# Altium PCB PCB1.PcbDoc
Units mil, origin at the board's own origin, x right, y up, seen from the top; angles counter-clockwise.
Board outline 3543.31 x 3937.01 mil, 2 copper layers (Top Layer, Bottom Layer); 9 components, 25 nets, 87 pads, 9 vias.
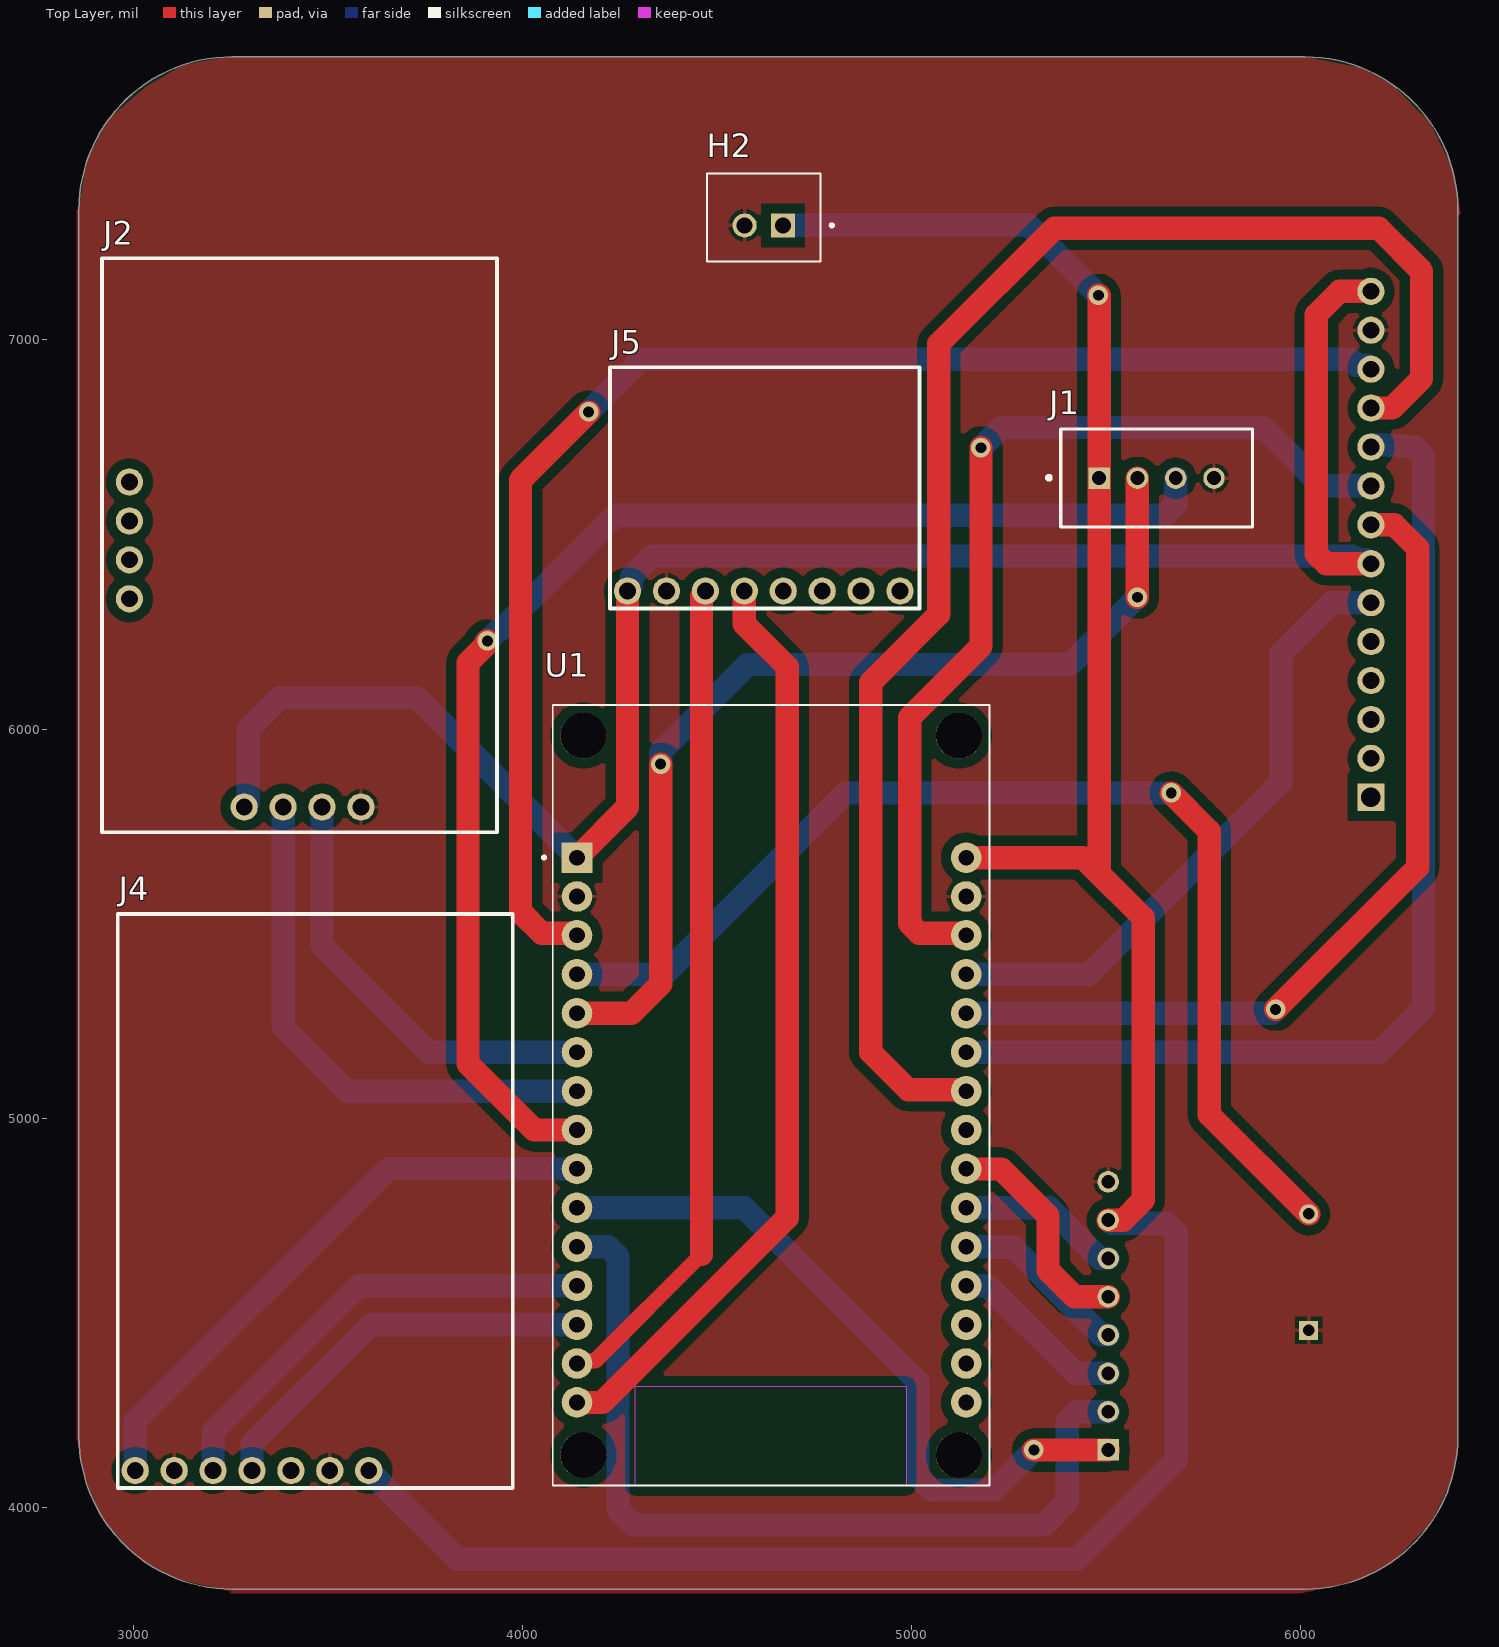
[diagram p0: Top Layer view]
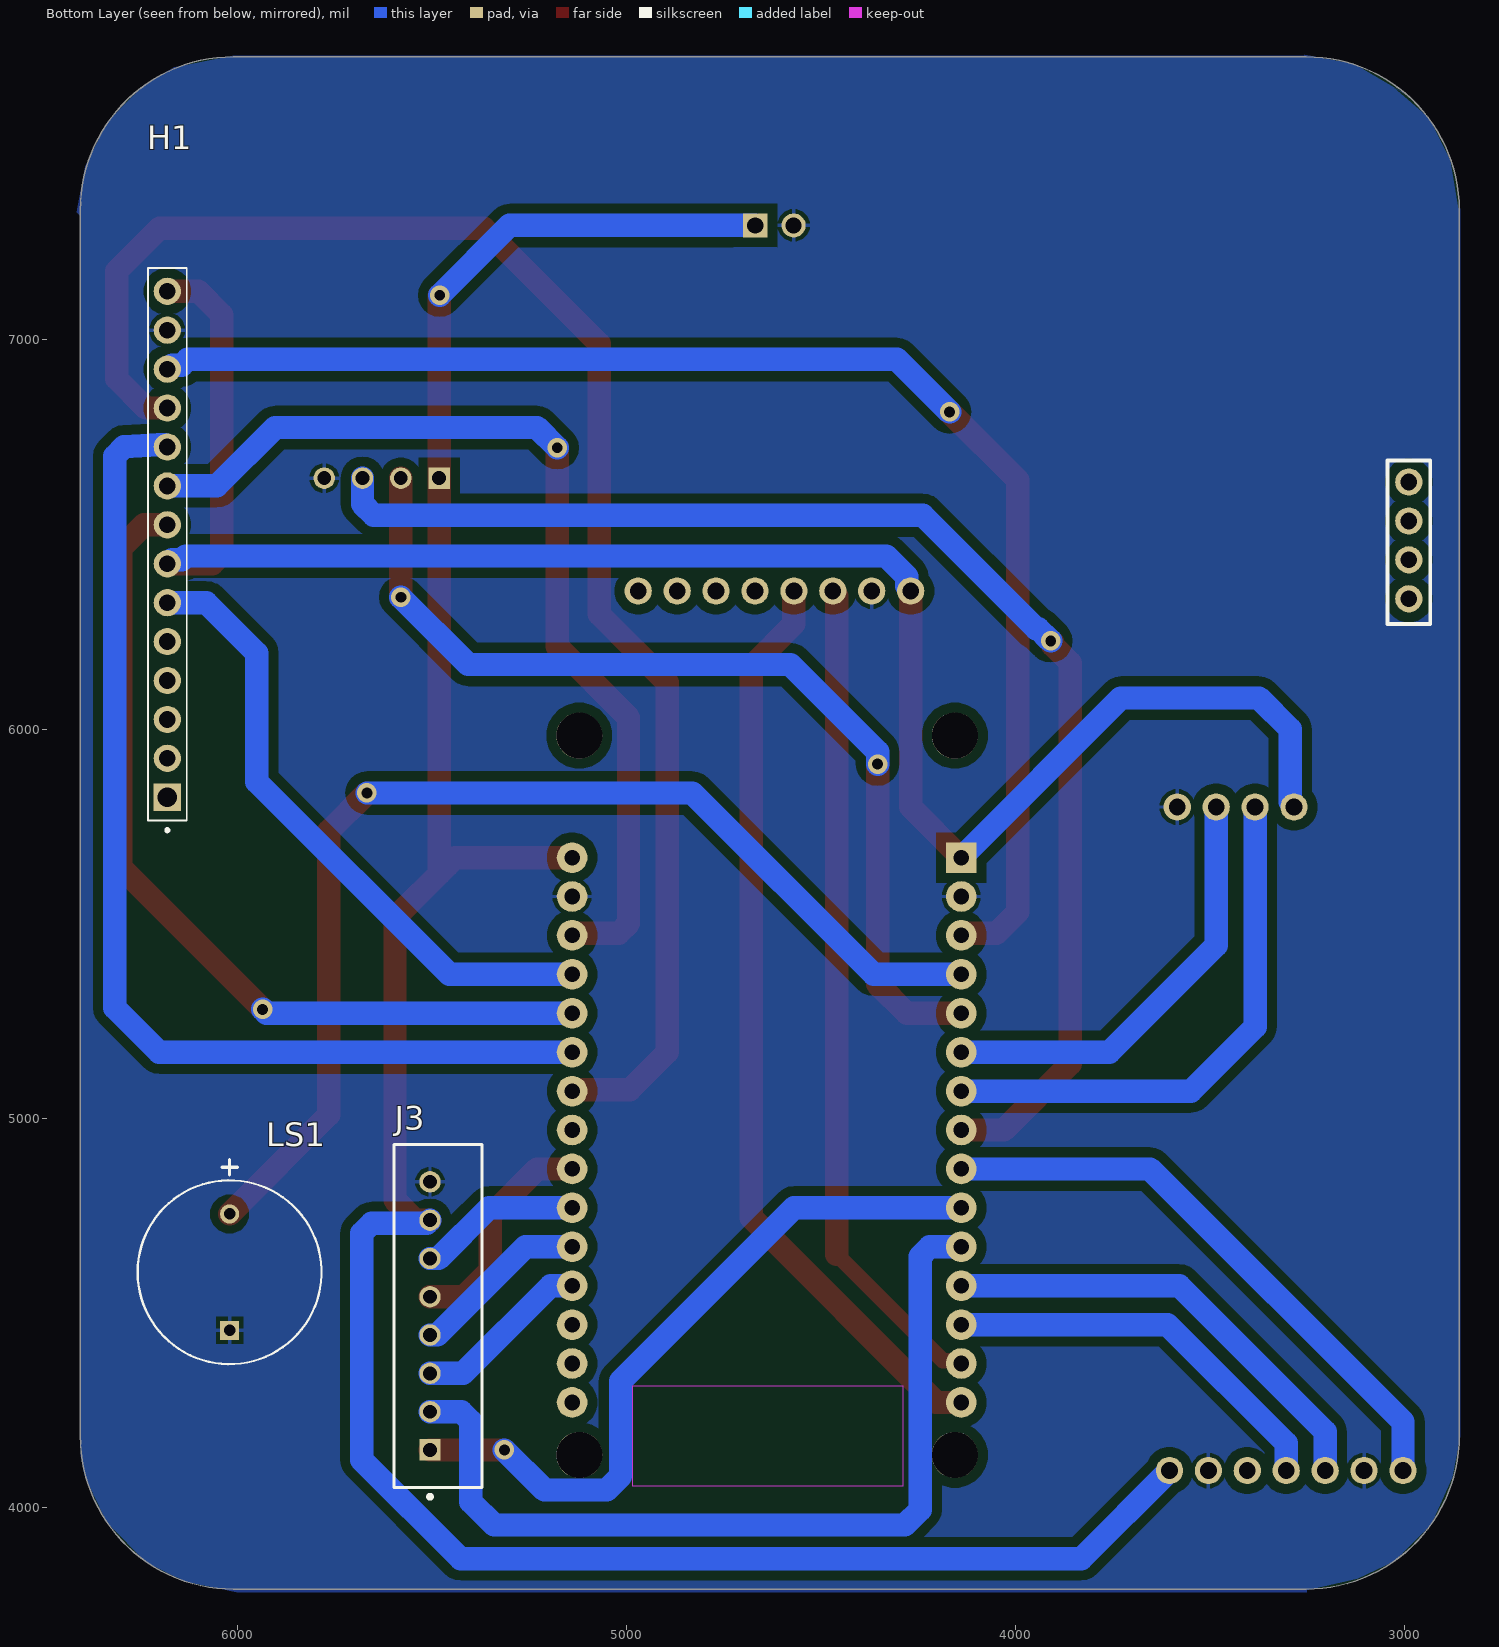
[diagram p1: Bottom Layer view, seen from below]

## Layer stack, top to bottom
Top Solder: solder mask 0.4, Solder Resist, Dk 3.5
Top Layer: signal copper 1.4
Dielectric 1: dielectric 12.6, FR-4, Dk 4.8
Bottom Layer: signal copper 1.4
Bottom Solder: solder mask 0.4, Solder Resist, Dk 3.5

## Board outline
3254.04,3790.42 cw(c3254.04,4184.12) 2860.34,4184.12 2860.34,7333.73 cw(c3254.04,7333.73) 3254.04,7727.43 6009.94,7727.43 cw(c6009.94,7333.73) 6403.64,7333.73 6403.64,4184.12 cw(c6009.94,4184.12) 6009.94,3790.42

## Design rules (kind name [scope] priority, off if disabled: settings)
Clearance Clearance_3 [All] p1: gap=25 ignorepadtopadclearanceinfootprint=FALSE
Clearance [All] p2: gap=10 ignorepadtopadclearanceinfootprint=FALSE ismatrix=TRUE
PolygonConnect [All] p1: connectstyle=Relief reliefconductorwidth=10 reliefentries=4 polygonreliefangle="90 Angle" airgapwidth=10
RoutingVias [All] p1: holewidth=28 width=50 viastyle="Through Hole" minholewidth=28 minwidth=50 maxholewidth=28 maxwidth=50
SolderMaskExpansion [All] p1: expansion=4 istentingtop=FALSE
Width MaxMinWidth_1 [All] p1: maxlimit=70 minlimit=20 preferedwidth=60 minimp=50.000000 maximp=50.000000 favimp=50.000000
Width [All] p2: maxlimit=10 minlimit=10 preferedwidth=10
30 further rules are at their usual default settings.

## Components (designator, comment, footprint, x,y, rotation, side; value= is the part's Value field where it differs from the comment)
H1 "Display Headers" SULLINS_PPTC061LFBN-RC 6190,6575 r90 bottom
H2 "B2B-XH-A(LF)(SN)" JST_B2B-XH-A(LF)(SN) 4620,7315 r0 top
J1 "B04B-XASK-1(LF)(SN)" FP-B04B-XASK-1_LF_SN-MFG 5629.21,6645 r180 top
J2 "GPS" GPS 3455,6605 r0 top
J3 "B8B-XH-A(LF)(SN)" FP-B8B-XH-A_LF_SN-MFG 5484.33,4492.36 r270 bottom
J4 "SIM800L" SIM800L 3495,4920 r0 top
J5 "MPU6050" MPU6050 4760,7180 r0 top
LS1 "MCKPX-G1203A-K4056" "FP-MCKPX-G1203A-K4056-MFG - duplicate" 6020,4604.61 r90 bottom
U1 "ESP32-DEVKIT-V1" MODULE_ESP32_DEVKIT_V1 4640,5059.17 r0 top

## Footprints (in the part's own frame and the unit in brackets; to place one, negate y for a bottom-side part, rotate by r counter-clockwise, add the part's x,y. Pads: shape width x height; smd on the part's side, far side on the other; paste and mask are expansions set on the pad)
FP-B04B-XASK-1_LF_SN-MFG [mm]
  rect 1.4x1.4 hole 0.9 paste-2539.97 mask+0: 1(3.75,0)
  round 1.4 hole 0.9 paste-2539.97 mask+0: 2(1.25,0) 3(-1.25,0) 4(-3.75,0)
  silkscreen extent -6.25,-3.2 7.15,3.2, body extent -6.35,-3.3 6.35,3.3, height 0.25
FP-B8B-XH-A_LF_SN-MFG [mm]
  rect 1.4x1.4 hole 0.9 paste-2539.97 mask+0: 1(8.75,-0.525)
  round 1.4 hole 0.9 paste-2539.97 mask+0: 2(6.25,-0.525) 3(3.75,-0.525) 4(1.25,-0.525) 5(-1.25,-0.525) 6(-3.75,-0.525) 7(-6.25,-0.525) 8(-8.75,-0.525)
  silkscreen extent -11.2,-2.88 11.92,2.87, body extent -11.2,-2.88 11.2,2.88, height 7
"FP-MCKPX-G1203A-K4056-MFG - duplicate" [mm]
  round 1.25 hole 0.75 paste-2539.97 mask+0: +(3.8,0)
  rect 1.25x1.25 hole 0.75 paste-2539.97 mask+0: -(-3.8,0)
  silkscreen extent -6,-6 7.35,6, body extent -6,-6 6.38,6, height 9.5
GPS [mil]
  round 70 hole 43: 1(-170,-805) 2(-70,-805) 3(30,-805) 4(130,-805)
  silkscreen extent -535,-870 480,605
JST_B2B-XH-A(LF)(SN) [mm]
  rect 1.575x1.575 / inner round 1.575 / far side rect 1.575x1.575 hole 1.05: 1(1.25,-0.525)
  round 1.575 hole 1.05: 2(-1.25,-0.525)
  silkscreen extent -3.7,-2.88 4.54,2.87, body extent -3.7,-2.88 3.7,2.88, height 7
MODULE_ESP32_DEVKIT_V1 [mm]
  rect 2x2 / inner round 2 / far side rect 2x2 hole 1.02: 1(-12.7,15.515)
  round 2 hole 1.02: 2(-12.7,12.975) 3(-12.7,10.435) 4(-12.7,7.895) 5(-12.7,5.355) 6(-12.7,2.815) 7(-12.7,0.275) 8(-12.7,-2.265) 9(-12.7,-4.805) 10(-12.7,-7.345) 11(-12.7,-9.885) 12(-12.7,-12.425) 13(-12.7,-14.965) 14(-12.7,-17.505) 15(-12.7,-20.045) 16(12.7,-20.045) 17(12.7,-17.505) 18(12.7,-14.965) 19(12.7,-12.425) 20(12.7,-9.885) 21(12.7,-7.345) 22(12.7,-4.805) 23(12.7,-2.265) 24(12.7,0.275) 25(12.7,2.815) 26(12.7,5.355) 27(12.7,7.895) 28(12.7,10.435) 29(12.7,12.975) 30(12.7,15.515)
  round 3 hole 3 unplated: ""(-12.28,-23.475) ""(-12.28,23.475) ""(12.23,-23.475) ""(12.23,23.475)
  Keep-Out Layer region: 8.78,-25.475 -8.91,-25.475 -8.91,-18.985 8.78,-18.985
  Keep-Out Layer region: 8.78,-25.475 -8.91,-25.475 -8.91,-18.985 8.78,-18.985
  silkscreen extent -14.95,-25.48 14.23,25.48, body extent -14.1,-25.9 14.1,26.55, height 7.05
MPU6050 [mil]
  round 70 hole 43: 1(-490,-825) 2(-390,-825) 3(-290,-825) 4(-190,-825) 5(-90,-825) 6(10,-825) 7(110,-825) 8(210,-825)
  silkscreen extent -535,-870 260,-250
SIM800L [mil]
  round 70 hole 43: 1(-490,-825) 2(-390,-825) 3(-290,-825) 4(-190,-825) 5(-90,-825) 6(10,-825) 7(110,-825)
  silkscreen extent -535,-870 480,605
SULLINS_PPTC061LFBN-RC [mil]
  rect 70x70 hole 50: 1(-750,-10)
  round 70 hole 43: 2(-650,-10) 3(-550,-10) 4(-450,-10) 5(-350,-10) 6(-250,-10) 7(-150,-10) 8(-50,-10) 9(50,-10) 10(150,-10) 11(250,-10) 12(350,-10) 13(450,-10) 14(550,-10) ""(-240,-3200) ""(-140,-3200) ""(-40,-3200) ""(60,-3200)
  silkscreen extent -839,-3255 610,40, body extent -1084,-3180 885,41, height 650

## Part data
H1: library part "TFT-LCD-2.8'' Display Headers"
H2: "Connector Header Through Hole 2 position 0.098 (2.50mm)", Package=None, Check_prices=https://www.snapeda.com/parts/B2B-XH-A(LF)(SN)/JST+Sales+America+Inc./view-part/?ref=eda, MF="JST Sales America Inc.", MP=B2B-XH-A(LF)(SN), SnapEDA_Link=https://www.snapeda.com/parts/B2B-XH-A(LF)(SN)/JST+Sales+America+Inc./view-part/?ref=snap
J1: library part CMP-17439-000018-1, "CONN HEADER VERT 4POS 2.5MM", Current Rating=3A, Manufacturer=JST, Temperature="-25°C to +85°C", Temperature Range High=+85°C, Temperature Range Low=-25°C, Voltage Rating=250V, Automotive=No, Category=Conn, ComponentLink2Description=Datasheet, ComponentLink2URL=http://www.jst-mfg.com/product/pdf/eng/eXA1.pdf, Conn Gender=Male, Conn Orientation=Straight, Contact Material=Tin,Copper, Device Class L1=Connectors, Device Class L2="Headers and Wire Housings", Device Class L3=unset, Digikey Description="CONN HEADER VERT 4POS 2.5MM", Height=8.8mm, Lead Free=Yes, Manufacturer Part Number=B04B-XASK-1(LF)(SN), Number Of Contacts=4, Number Of Rows=1, Octopart=https://octopart.com/b04b-xask-1%28lf%29%28sn%29-jst-3990149, Package=B04B-XASK-1(LF)(SN), Pitch=2.5mm, RoHS=TRUE
J2: Current Rating=3A, Manufacturer=JST, Manufacturer Part Number=B04B-XASK-1(LF)(SN), Temperature="-25°C to +85°C", Temperature Range High=+85°C, Temperature Range Low=-25°C, Voltage Rating=250V, Automotive=No, Category=Conn, ComponentLink2Description=Datasheet, ComponentLink2URL=http://www.jst-mfg.com/product/pdf/eng/eXA1.pdf, Conn Gender=Male, Conn Orientation=Straight, Contact Material=Tin,Copper, Device Class L1=Connectors, Device Class L2="Headers and Wire Housings", Device Class L3=unset, Digikey Description="CONN HEADER VERT 4POS 2.5MM", Height=8.8mm, Lead Free=Yes, Number Of Contacts=4, Number Of Rows=1, Octopart=https://octopart.com/b04b-xask-1%28lf%29%28sn%29-jst-3990149, Package=B04B-XASK-1(LF)(SN), Pitch=2.5mm, RoHS=TRUE
J3: library part CMP-17438-000015-1, "CONN HEADER VERT 8POS 2.5MM", Color=Natural, Contact Resistance=20mR, Current Rating=3A, Housing Color=White, Insulation Resistance=1GR, Max Operating Temperature=85°C, Max Voltage Rating (AC)=250V, Min Operating Temperature=-25°C, Connector Type="Male Pin", Contact Material=Brass, Contact Plating=Tin, Contact Type="Male Pin", Depth=5.75mm, Fastening Type=Detent, Housing Material=Polyamide, Lead Free="Lead Free", Lead Pitch=2.5mm, Length=22.4mm, Max Current Rating=3A, Mount="Through Hole", Number Of Contacts=8, Number of Positions=8, Number Of Rows=1, Orientation=Straight, Packaging=Bulk, Pitch=2.5mm, REACH SVHC="No SVHC", Series=XH, Termination=Press-Fit, Voltage Rating=250V, Voltage Rating (AC)=250V, Wire/Cable Gauge=22AWG
LS1: "MAGNETIC BUZZER AND TRANSDUCER - More Details", Current=30mA, Frequency=2300Hz, Manufacturer="Multicomp Pro", Max Supply Voltage=5V, Min Supply Voltage=2V, Operating Supply Voltage=3V, Package=0, Temperature="-20°C to +70°C", Temperature Range High=+70°C, Temperature Range Low=-20°C, Automotive=No, Category=Speak, ComponentLink2Description=Datasheet, ComponentLink2URL=http://www.farnell.com/datasheets/1498149.pdf?_ga=2.17855225.1157923166.1572356775-536200964.1569240579, Device Class L1=Electromechanical, Device Class L2="Audio Products", Device Class L3=Buzzers, Height=9.5mm, Lead Free=Yes, Manufacturer Part Number=MCKPX-G1203A-K4056, Octopart=https://octopart.com/mckpx-g1203a-k4056-multicomp-12157154, RoHS=TRUE, Standoff Height=0.5mm
U1: "Dual core, Wi-Fi: 2.4 GHz up to 150 Mbits/s,BLE (Bluetooth Low Energy) and legacy Bluetooth, 32 bits, Up to 240 MHz", Package=None, Check_prices=https://www.snapeda.com/parts/ESP32-DEVKIT-V1/Do+it/view-part/?ref=eda, MF="Do it", MP=ESP32-DEVKIT-V1, SnapEDA_Link=https://www.snapeda.com/parts/ESP32-DEVKIT-V1/Do+it/view-part/?ref=snap

## Via types
v1: diameter 50, hole 28, Top Layer to Bottom Layer, 9 vias

## Nets (pads, with @x,y where several pads share a name; then routed paths per layer and width w, separated by ;. In a path a pad name is that pad's centre, name@x,y a point inside that pad or via, vN(x,y) a via of type N, cw(c..) or ccw(c..) an arc to the next point about the centre after c; other vN are vias at no path point)
3V3: H1.7 H1.14 J2.1 J5.1 U1.1 | length 4892.8
  Top Layer w60: U1.1 4270,5800 J5.1 ; H1.7 6064.9,6425 6040,6449.9 6040,7065 6100,7125 H1.14
  Bottom Layer w60: J2.1 3285,5802.71 3295,5812.71 3295,6000 3375,6080 3730,6080 U1.1 ; J5.1 4270,6357.71 4280,6367.71 4280,6392.28 4332.72,6445 6132.72,6445 6142.72,6435 6167.29,6435 6177.29,6425 H1.7
GND: H1.13 H2.2 J1.4 J2.4 J3.8 J4.2 J4.6 J5.2 LS1.- U1.2 U1.29
NetH1_6: H1.6 U1.27 | length 1628.9
  Bottom Layer w60: U1.27 5455,5370 5950,5865 5950,6195 6080,6325 H1.6
NetH1_8: H1.8 U1.26 | length 2280.2
  Top Layer w60: v1(5935,5280) 6300,5645 6300,6465 6240,6525 H1.8
  Bottom Layer w60: U1.26 5925,5270 v1(5935,5280)
NetH1_9: H1.9 U1.28 | length 2541.6
  Top Layer w60: U1.28 5136.41,5473.59 5123.16,5473.59 5121.12,5475.63 5019.9,5475.63 4995,5500.53 4995,6030 5178,6213 v1(5178,6723)
  Bottom Layer w60: v1(5178,6723) 5230,6775 5903,6775 6053,6625 H1.9
NetH1_10: H1.10 U1.25 | length 2787
  Bottom Layer w60: U1.25 6200.91,5170 6315,5284.09 6315,6701.64 6291.12,6725.52 6202.51,6730.7 6186.41,6730.7 H1.10
NetH1_11: H1.11 U1.24 | length 4025.6
  Top Layer w60: U1.24 5136.41,5073.59 4991.41,5073.59 4895,5170 4895,6120 5070,6295 5070,6990 5367,7287 6200,7287 6310,7177 6310,6900 6235,6825 H1.11
NetH1_12: H1.12 U1.3 | length 3603.6
  Top Layer w60: U1.3 4136.41,5473.59 4123.16,5473.59 4121.12,5475.63 4049.37,5475.63 3995,5530 3995,6640 v1(4170,6815)
  Bottom Layer w60: v1(4170,6815) 4305,6950 6127.72,6950 6142.72,6935 6167.29,6935 6177.29,6925 H1.12
NetJ1_2: J1.2 U1.5 | length 2538.5
  Top Layer w60: U1.5 4280,5270 4355,5345 v1(4355,5910) ; v1(5580,6339) J1.2
  Bottom Layer w60: v1(4355,5910) 4355,5942 4579,6166 5407,6166 v1(5580,6339)
NetJ1_3: J1.3 U1.8 | length 3438.7
  Top Layer w60: v1(3910,6226.95) 3905,6221.95 3905,6216 3860,6171 3860,5140 4030,4970 U1.8
  Bottom Layer w60: v1(3910,6226.95) 3913.52,6230.46 3914.46,6230.46 3942,6258 3947,6258 4239,6550 5650,6550 5678.43,6578.43 J1.3
NetJ2_2: J2.2 U1.7 | length 1388.3
  Bottom Layer w60: J2.2 3385,5235 3550,5070 U1.7
NetJ2_3: J2.3 U1.6 | length 1123.9
  Bottom Layer w60: J2.3 3485,5445 3760,5170 U1.6
NetJ3_1: J3.1 U1.10 | length 1850.9
  Top Layer w60: v1(5313.87,4147.87) J3.1
  Bottom Layer w60: U1.10 4569.83,4770 5015.67,4324.16 5015.67,4080.15 5050.82,4045 5211,4045 v1(5313.87,4147.87)
NetJ3_2: J3.2 U1.11 | length 2285.8
  Bottom Layer w60: U1.11@4140,4668.1 U1.11 4220.69,4670 4245.59,4645.1 4245.59,3994.41 4285,3955 5340,3955 5400,4015 5400,4221.4 5424.9,4246.3 J3.2
NetJ3_3: J3.3 U1.19 | length 458.3
  Bottom Layer w60: U1.19 5195,4570 5420.28,4344.72 J3.3
NetJ3_4: J3.4 U1.20 | length 459
  Bottom Layer w60: U1.20 5259.82,4670 5422.44,4507.38 5486.67,4443.15 J3.4
NetJ3_5: J3.5 U1.22 | length 583
  Top Layer w60: U1.22 5230,4870 5350.4,4749.6 5350.4,4609.6 5418.43,4541.57 J3.5
NetJ3_6: J3.6 U1.21 | length 418.8
  Bottom Layer w60: U1.21 5353.22,4770 5483.22,4640 J3.6
NetJ4_1: J4.1 U1.9 | length 1529.2
  Bottom Layer w60: J4.1 3005,4220 3655,4870 U1.9
NetJ4_3: J4.3 U1.12 | length 1190.3
  Bottom Layer w60: J4.3 3205,4195 3580,4570 U1.12
NetJ4_4: J4.4 U1.13 | length 1031.3
  Bottom Layer w60: J4.4 3305,4165 3610,4470 U1.13
NetJ5_3: J5.3 U1.14 | length 2145.1
  Top Layer w40: U1.14 4147.16,4377.16 4187.16,4377.16 4460,4650
  Top Layer w60: 4460,4650 4460,6342.29 4470,6352.29 J5.3
NetJ5_4: J5.4 U1.15 | length 2392.3
  Top Layer w60: U1.15 4205,4270 4680,4745 4680,6160 4570,6270 J5.4
NetLS1_+: LS1.+ U1.4 | length 2948
  Top Layer w60: v1(5667,5836) 5765,5738 5765,5009.21 LS1.+
  Bottom Layer w60: U1.4 4365,5370 4831,5836 v1(5667,5836)
VCC: H2.1 J1.1 J3.7 J4.7 U1.30 | length 6774
  Top Layer w60: U1.30 5440,5670 5460.79,5649.21 5595,5515 5595,4790 5543.42,4738.42 J3.7 ; v1(5480,7115) 5481.57,7113.43 J1.1 5481.57,5628.43
  Bottom Layer w60: J4.7 3832,3868 5426,3868 5680,4122 5680,4705.1 5655.1,4730 5513.42,4730 J3.7 ; H2.1 5300.67,7294.33 v1(5480,7115)
pads on no net: H1. H1.1 H1.2 H1.3 H1.4 H1.5 J4.5 J5.5 J5.6 J5.7 J5.8 U1. U1.16 U1.17 U1.18 U1.23

## Polygon pours and split planes (outlines as drawn)
GND on Bottom Layer "Top" (solid, remove dead copper, pour order 1): 3122.09,3816.64 3027.43,3862.57 2932.43,3957.57 2878.17,4077.65 2857.43,4182.57 2857.43,7337.57 2862.43,7337.57 2883.05,7461.05 2937.56,7569.06 3030.23,7649.92 2992.05,7627.99 3131.71,7709.71 3257.43,7732.57 3260,7730 6012.37,7730 6162.23,7700.58 6242.43,7652.57 6332.43,7562.57 6390.85,7444.73 6412.43,7327.57 6402.43,7317.57 6402.43,4183.05 6402.43,4133.25 6390.85,4077.65 6334.68,3960.6 6232.81,3858.73 6132.22,3809.42 6001.95,3782.57 3252.43,3782.57 3252.43,3787.57
GND on Top Layer "Top" (solid, remove dead copper, pour order 0): 3119.66,3814.06 3025,3860 2930,3955 2875.74,4075.07 2855,4180 2855,7335 2860,7335 2880.63,7458.48 2935.13,7566.48 3027.8,7647.35 2989.62,7625.42 3129.29,7707.14 3255,7730 3257.57,7727.43 6009.94,7727.43 6159.8,7698 6240,7650 6330,7560 6388.42,7442.15 6410,7325 6400,7315 6400,4180.48 6400,4130.68 6388.42,4075.07 6332.25,3958.03 6230.38,3856.16 6129.79,3806.85 5999.52,3780 3250,3780 3250,3785

## Silkscreen, mask and mechanical layers (free items; w line width, h text height)
Mechanical 1:
  lines w0.5: 2860.34,4184.12 ccw(c3254.04,4184.12) 3254.04,3790.42 6009.94,3790.42 ccw(c6009.94,4184.12) 6403.64,4184.12 6403.64,7333.73 ccw(c6009.94,7333.73) 6009.94,7727.43 3254.04,7727.43 ccw(c3254.04,7333.73) 2860.34,7333.73 2860.34,4184.12
  lines w20: 2860.34,4184.12 ccw(c3254.04,4184.12) 3254.04,3790.42 6009.94,3790.42 ccw(c6009.94,4184.12) 6403.64,4184.12 6403.64,7333.73 ccw(c6009.94,7333.73) 6009.94,7727.43 3254.04,7727.43 ccw(c3254.04,7333.73) 2860.34,7333.73 2860.34,4184.12